# Altium PCB 2019-10-29_14-21-28.PcbDoc
Units mil, origin at the board's own origin, x right, y up, seen from the top; angles counter-clockwise.
Board outline 2004 x 2504 mil, 4 copper layers (Top Layer, MidLayer1, MidLayer2, Bottom Layer); 21 components, 11 nets, 42 pads, 203 vias.
Unrouted connection lines stored in the file: 1.
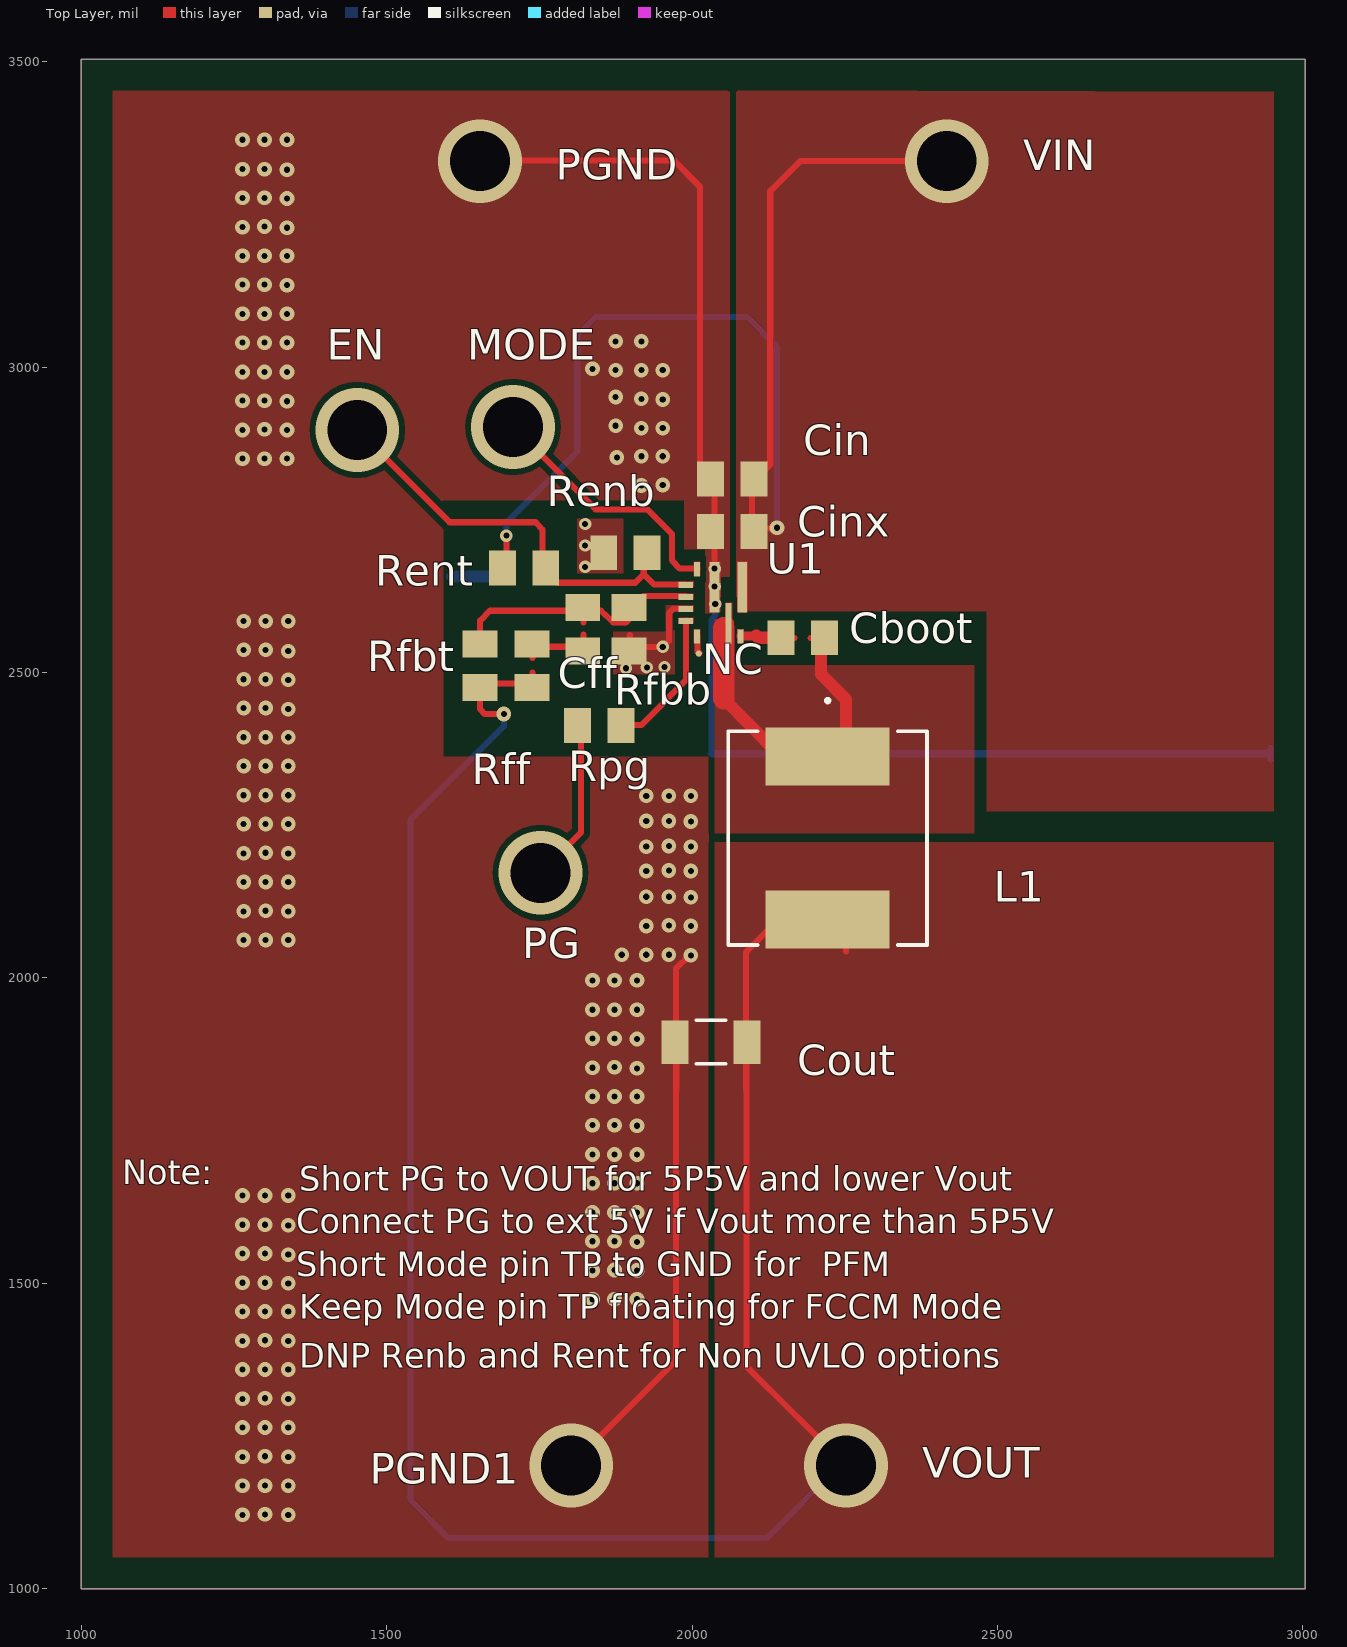
[diagram p0: Top Layer view]
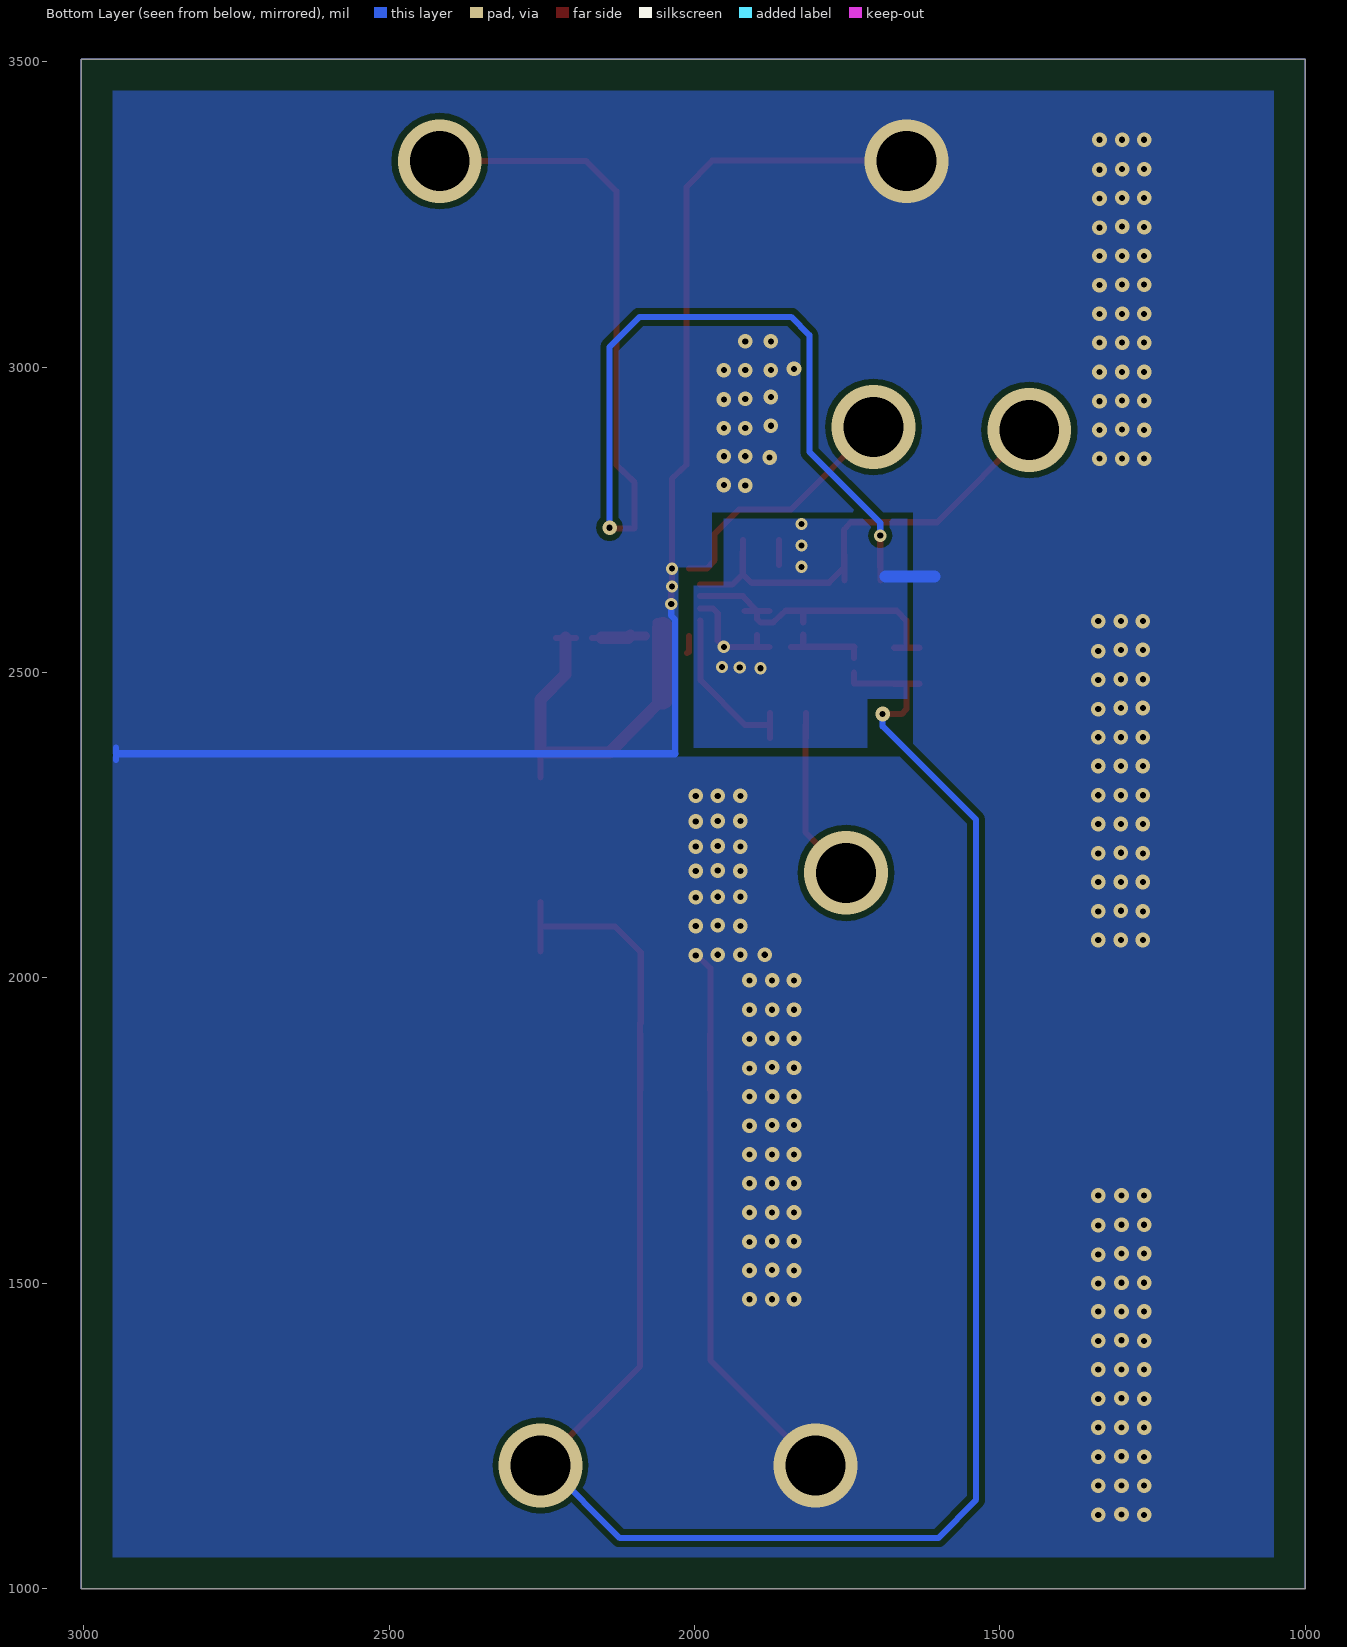
[diagram p1: Bottom Layer view, seen from below]
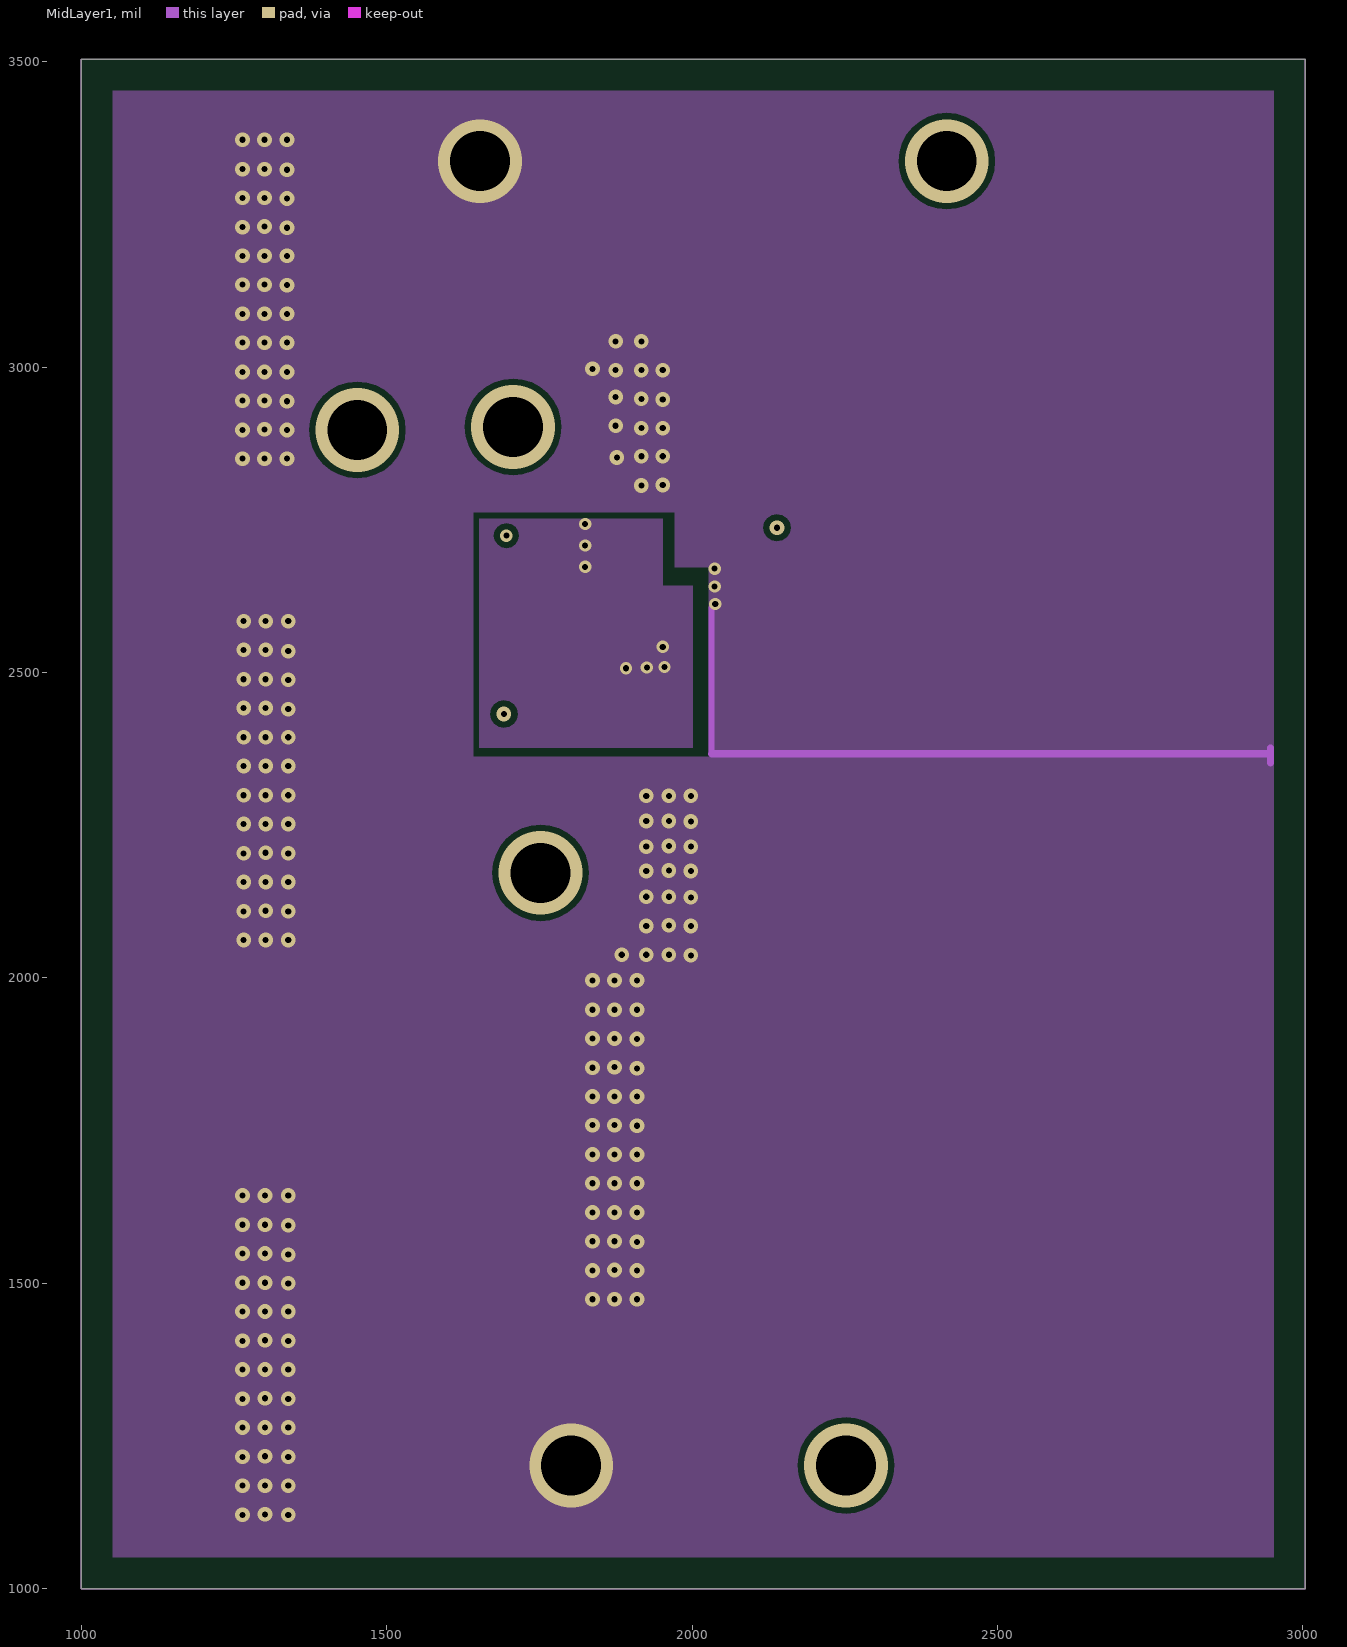
[diagram p2: MidLayer1]
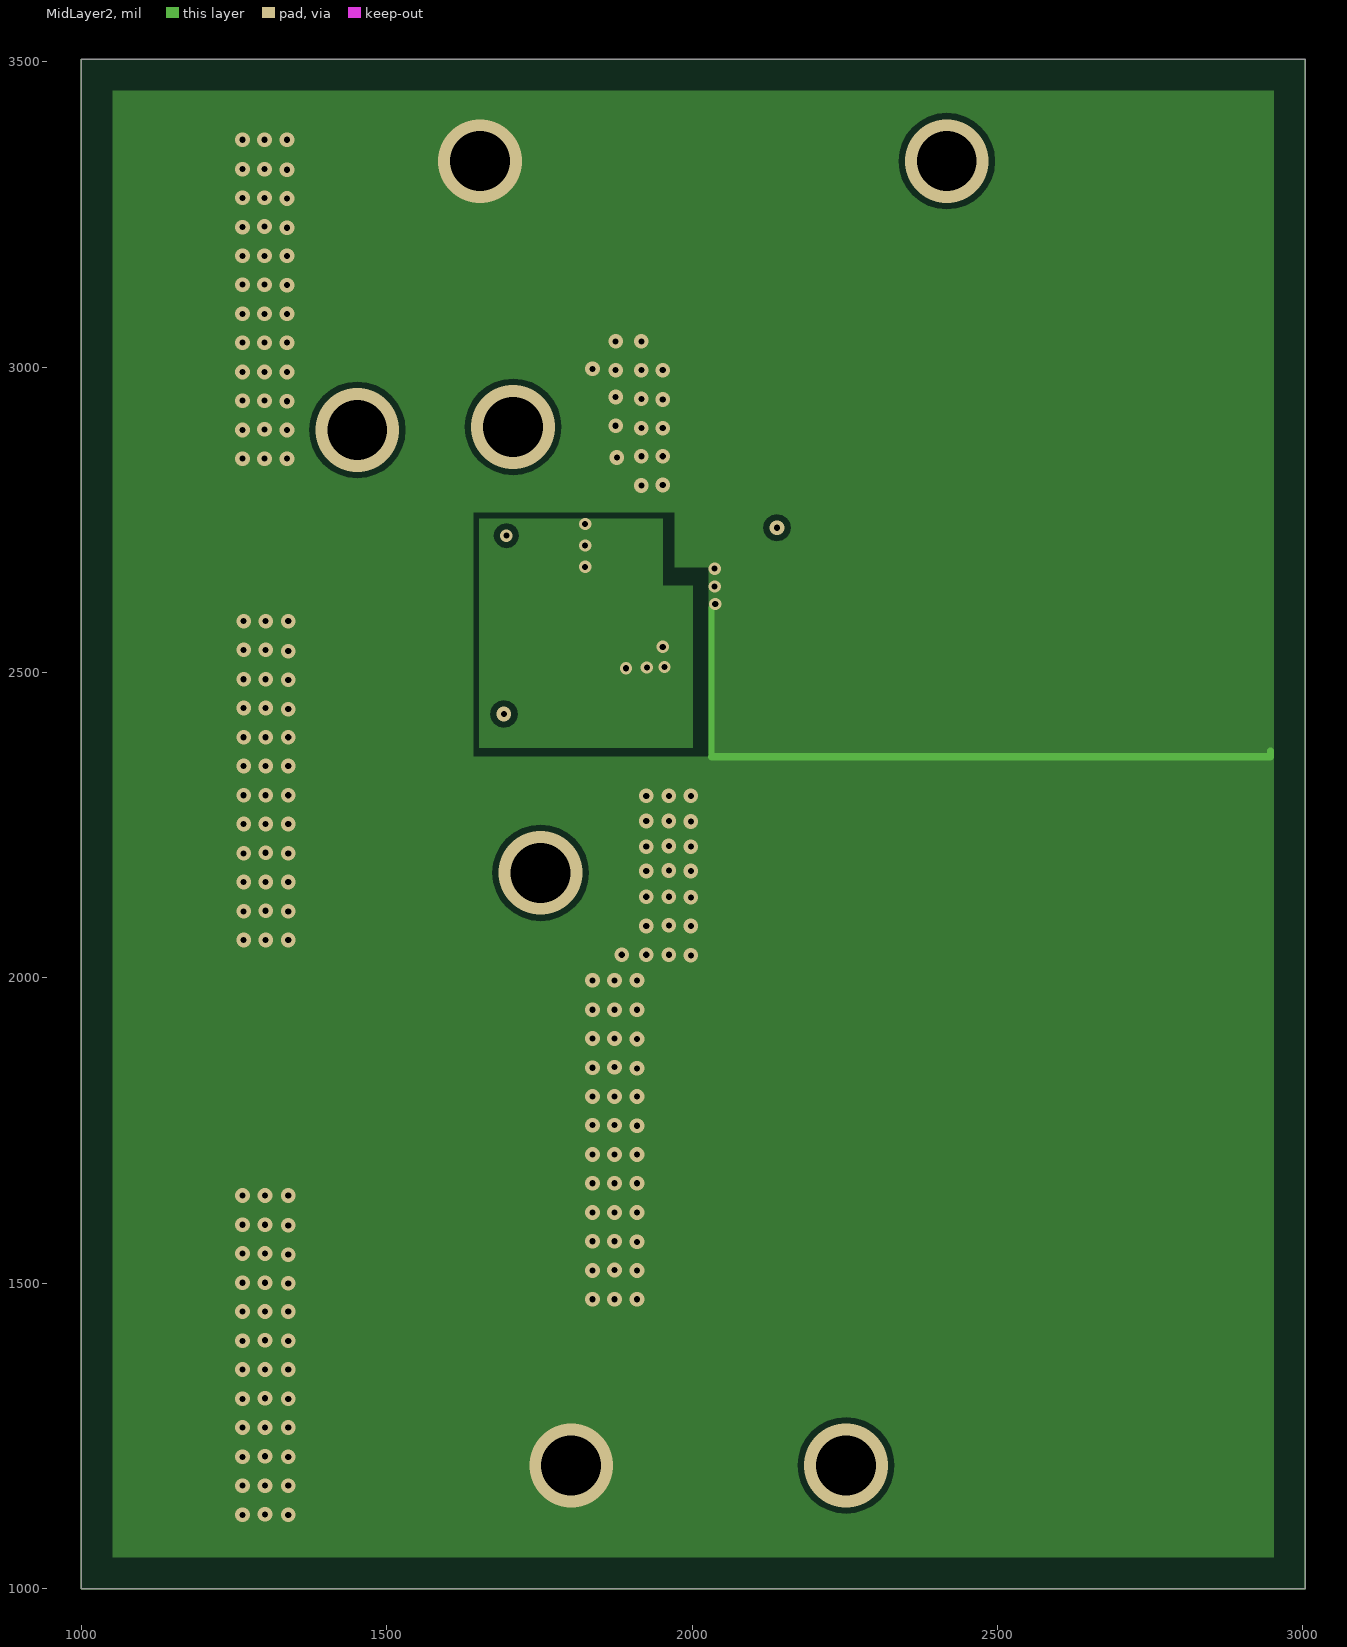
[diagram p3: MidLayer2]

## Layer stack, top to bottom
Top Solder: solder mask 0.4, Solder Resist, Dk 3.5
Top Layer: signal copper 1.4
Dielectric1: core 12.6, FR-4, Dk 4.8
MidLayer1: signal copper 1.4
Dielectric2: prepreg 12.6, FR-4, Dk 4.8
MidLayer2: signal copper 1.4
Dielectric3: core 12.6, FR-4, Dk 4.8
Bottom Layer: signal copper 1.4
Bottom Solder: solder mask 0.4, Solder Resist, Dk 3.5

## Board outline
1000,1000 3004,1000 3004,3504 1000,3504

## Design rules (kind name [scope] priority, off if disabled: settings)
Clearance [All] p1: gap=10 ignorepadtopadclearanceinfootprint=FALSE except(0: Arc-Hole Track-Hole SMDPad-Hole THPad-Hole Via-Hole Fill-Hole Poly-Hole Region-Hole Text-Hole)
PlaneConnect [All] p1: planeconnectstyle=Direct reliefexpansion=20 reliefentries=4 reliefconductorwidth=10 reliefairgap=10
PolygonConnect [All] p1: connectstyle=Direct reliefconductorwidth=10 reliefentries=4 polygonreliefangle="90 Angle" airgapwidth=10
RoutingVias [All] p1: holewidth=28 width=50 viastyle="Through Hole" minholewidth=28 minwidth=50 maxholewidth=28 maxwidth=50
SolderMaskExpansion [All] p1: expansion=4
Width [All] p1: maxlimit=10 minlimit=10 preferedwidth=10
29 further rules are at their usual default settings.

## Components (designator, comment, footprint, x,y, rotation, side; value= is the part's Value field where it differs from the comment)
Cboot "Comment" 0805 2181,2557 r0 top
Cff "Comment" 0805 1821,2571 r90 top
Cin "Comment" 0805 2066,2817 r180 top
Cinx "Comment" 0805 2066,2731 r180 top
Cout "Comment" 1206_190 2031,1895 r180 top
EN "Comment" TP-1502 1451,2896 r90 top
L1 "Comment" IHLP-3232DZ 2222,2229 r270 top
MODE "Comment" TP-1502 1706,2901 r90 top
NC "Comment" SMD_PAD1 2011,2531 r90 top
PG "Comment" TP-1502 1751,2171 r90 top
PGND "Comment" TP-1502 1653,3336 r90 top
PGND1 "Comment" TP-1502 1801,1201 r90 top
Renb "Comment" 0805 1891,2696 r180 top
Rent "Comment" 0805 1725,2671 r180 top
Rfbb "Comment" 0805 1897,2571 r270 top
Rfbt "Comment" 0805 1653,2511 r90 top
Rff "Comment" 0805 1738,2511 r270 top
Rpg "Comment" 0805 1848,2413 r180 top
U1 "Comment" RPA0010A 2045,2614 r0 top
VIN "Comment" TP-1502 2416,3336 r90 top
VOUT "Comment" TP-1502 2251,1201 r90 top

## Footprints (in the part's own frame and the unit in brackets; to place one, negate y for a bottom-side part, rotate by r counter-clockwise, add the part's x,y. Pads: shape width x height; smd on the part's side, far side on the other; paste and mask are expansions set on the pad)
0805 [mil]
  rect 44x57 smd: 1(-35.5,0) 2(35.5,0)
1206_190 [mil]
  rect 44x71 smd: 1(-59,0) 2(59,0)
  silkscreen extent -24,-36 24,36
IHLP-3232DZ [mil]
  rect 95x203 smd: 1(-133.5,0) 2(133.5,0)
  silkscreen extent -228,-163 175,163
RPA0010A [mm]
  rect 0.6x0.25 smd: 1(-1.4,0.75) 2(-1.4,0.25) 3(-1.4,-0.25) 4(-1.4,-0.75)
  rect 0.25x0.6 smd: 5(-0.93,-1.4) 7(0.87,-1.4) 10(-0.93,1.4)
  rect 0.25x1.7 smd: 6(0.37,-0.85)
  rect 0.4x2.1 smd: 8(0.95,0.65) 9(-0.21,0.65)
SMD_PAD1 [mil]
  round 10 smd: 1(0,0)
TP-1502 [mil]
  round 65 / inner round 0 / far side round 65 hole 32 unplated: 1(0,0)

## Via types
v1: diameter 24/24/24/24 (per signal layer), hole 10, Top Layer to Bottom Layer, 185 vias
v2: diameter 20/20/20/20 (per signal layer), hole 10, Top Layer to Bottom Layer, 11 vias
v3: diameter 137/137/137/137 (per signal layer), hole 98, Top Layer to Bottom Layer, 7 vias

## Nets (pads, with @x,y where several pads share a name; then routed paths per layer and width w, separated by ;. In a path a pad name is that pad's centre, name@x,y a point inside that pad or via, vN(x,y) a via of type N, cw(c..) or ccw(c..) an arc to the next point about the centre after c; other vN are vias at no path point)
0: Cin.2 Cinx.2 Cout.2 PGND1.1 PGND.1 Renb.2 Rfbb.2 U1.3 U1.9 | length 5945.9
  Top Layer w10: PGND.1@1653,3338 1971,3338 2013,3295 2013,2840 2037,2817 2037,2732 v2(2037,2670) v2(2037,2641) 2038,2641 v2(2038,2612) ; v3(1802,1202) 1974,1374 1974,1862 1974,2016 1996,2037 v1(1998,2037) ; Renb.2@1861.5,2676 Renb.2@1861.5,2717 ; Rfbb.2@1877,2541.5 Rfbb.2@1918,2541.5 ; 1898,2561 1898,2542 v2(1952,2542) 1962,2552 1962,2597 1970,2605 U1.3@1991,2605 ; 1974.5,1816 Cout.2@1974.5,1908
  MidLayer1 w10: 2032,2367 2032,2606 v2(2038,2612)
  MidLayer1 w11: 2947,2352 2947,2377
  MidLayer1 w12: 2032,2367 2942,2367
  MidLayer2 w10: 2032,2362 2032,2606 v2(2038,2612)
  MidLayer2 w11: 2947,2362 2947,2372
  MidLayer2 w12: 2032,2362 2947,2362
  Bottom Layer w10: 2032,2367 2032,2587 2038,2593 v2(2038,2612) ; 2947,2357 2947,2377
  Bottom Layer w12: 2032,2367 2942,2367
  Bottom Layer w20: 1607,2657 1687,2657
  other v1: 1264,1121 1339,1121 1301,1122 1264,1169 1301,1169 1339,1169 1264,1216 1339,1216 1301,1217 1264,1264 1301,1264 1339,1264 1264,1311 1339,1311 1301,1312 1264,1359 1301,1359 1339,1359 1264,1406 1339,1406 1301,1407 1264,1454 1301,1454 1339,1454 1837,1474 1873,1474 1910,1474 1339,1500 1264,1501 1301,1501 1837,1521 1910,1521 1873,1522 1339,1547 1264,1549 1301,1549 1910,1568 1837,1569 1873,1569 1339,1595 1264,1596 1301,1596 1837,1616 1873,1616 1910,1616 1264,1644 1301,1644 1339,1644 1837,1664 1873,1664 1910,1664 1837,1711 1873,1711 1910,1711 1910,1758 1837,1759 1873,1759 1837,1806 1873,1806 1910,1806 1910,1852 1837,1853 1873,1854 1910,1900 1837,1901 1873,1901 1837,1948 1873,1948 1910,1948 1837,1996 1873,1996 1910,1996 1885,2038 1925,2038 1962,2038 1266,2062 1302,2062 1339,2062 1925,2085 1998,2085 1962,2086 1266,2109 1339,2109 1302,2110 1998,2132 1925,2133 1962,2133 1266,2157 1302,2157 1339,2157 1925,2175 1998,2175 1962,2176 1266,2204 1339,2204 1302,2205 1925,2215 1998,2215 1962,2216 1266,2252 1302,2252 1339,2252 1998,2256 1925,2257 1962,2257 1925,2298 1962,2298 1998,2298 1266,2299 1302,2299 1339,2299 1266,2347 1302,2347 1339,2347 1266,2394 1302,2394 1339,2394 1339,2440 1266,2442 1302,2442 1339,2488 1266,2489 1302,2489 1339,2535 1266,2537 1302,2537 1266,2584 1302,2584 1339,2584 1917,2806 1952,2807 1264,2850 1300,2850 1337,2850 1877,2852 1917,2854 1952,2854 1264,2897 1337,2897 1300,2898 1917,2900 1952,2900 1875,2904 1337,2944 1264,2945 1300,2945 1952,2947 1917,2948 1875,2951 1264,2992 1300,2992 1337,2992 1875,2995 1917,2995 1952,2995 1837,2997 1264,3040 1300,3040 1337,3040 1875,3042 1917,3042 1264,3087 1300,3087 1337,3087 1337,3134 1264,3135 1300,3135 1264,3182 1300,3182 1337,3182 1337,3228 1264,3229 1300,3230 1337,3276 1264,3277 1300,3277 1337,3323 1264,3324 1300,3324 1264,3372 1300,3372 1337,3372
  other v2: 1892,2507 1926,2508 1955,2509 1825,2673 1825,2708 1825,2743
  other v3: 1653,3337
1: Cff.2 Rfbb.1 Rfbt.2 U1.2 | length 563.9
  Top Layer w10: Rfbt.2@1632,2540.5 Rfbt.2@1673,2540.5 ; Rfbt.2@1653,2541 1653,2585 1669,2601 Cff.2@1822,2601 ; Cff.2@1801,2600.5 Cff.2@1842,2600.5 ; 1822,2582 Cff.2@1822,2601 ; Rfbb.1@1877,2600.5 Rfbb.1@1918,2600.5 ; U1.2@1991,2625 1921,2625 1898,2601 1898,2588 1892,2582 1871,2582 1851,2601 Cff.2@1822,2601
2: Cout.1 L1.2 PG.1 Rfbt.1 Rff.2 Rpg.2 VOUT.1 | length 3939.9
  Top Layer w10: Rfbt.1@1632,2481.5 Rfbt.1@1673,2481.5 ; v1(1692,2432) 1661,2432 1653,2440 1653,2482 1739,2482 1739,2500 ; v3(1752,2172) 1818,2238 Rpg.2@1818,2414 ; Rpg.2@1817.5,2393 Rpg.2@1817.5,2434 ; Cout.1@2088,1926 2088,2042 2130,2084 L1.2@2252,2084 ; 2088.5,1816 Cout.1@2088.5,1908 ; Cout.1@2089,1926 2089,1862 2089,1364 v3(2252,1202) ; 2252,2043 L1.2@2252,2124
  Bottom Layer w10: v1(1692,2432) 1692,2412 1539,2259 1539,1146 1601,1083 2122,1083 2241,1202 v3(2252,1202)
3: Cff.1 Rff.1 | length 162
  Top Layer w10: 1739,2524 Rff.1@1739,2541 ; Cff.1@1801,2541.5 Cff.1@1842,2541.5 ; Cff.1@1822,2542 1822,2562
  Top Layer w11: Rff.1@1739,2541 1739,2542 Cff.1@1822,2542
5: Cboot.2 L1.1 U1.6 | length 684.5
  Top Layer w10: 2194,2556.5 Cboot.2@2227,2556.5 ; L1.1@2252,2328 L1.1@2252,2409
  Top Layer w15: 2052,2573 U1.6@2061,2582
  Top Layer w20: 2052,2457 2139,2369 2252,2369 2252,2456 2211,2497 Cboot.2@2211,2557
  Top Layer w35: 2052,2457 2052,2573
6: Cin.1 Cinx.1 Rent.2 U1.8 VIN.1 | length 2040.2
  Top Layer w10: Rent.2@1695.5,2651 Rent.2@1695.5,2692 ; Rent.2@1696,2672 v2(1696,2724) ; v1(2139,2737) 2138,2736 2098,2736 2098,2811 2128,2840 2128,3288 2177,3337 v3(2417,3337)
  Bottom Layer w10: v2(1696,2724) 1696,2745 1812,2861 1812,3052 1842,3082 2090,3082 2139,3033 v1(2139,2737)
10: EN.1 Renb.1 Rent.1 U1.1 | length 810
  Top Layer w10: v3(1452,2897) 1603,2746 1744,2746 1755,2734 1755,2672 1780,2647 1907,2647 1921,2661 ; Rent.1@1754.5,2651 Rent.1@1754.5,2692 ; Renb.1@1920.5,2676 Renb.1@1920.5,2717 ; Renb.1@1921,2697 1921,2661 ; U1.1@1991,2644 1938,2644 1921,2661
16: Cboot.1 U1.7 | length 106.2
  Top Layer w10: Cboot.1@2135,2556.5 2168,2556.5
  Top Layer w15: U1.7@2080,2560 2105,2560
  Top Layer w20: 2105,2560 2108,2557 Cboot.1@2152,2557
17: Rpg.1 U1.4 | length 281.2
  Top Layer w10: Rpg.1@1876.5,2393 Rpg.1@1876.5,2434 ; Rpg.1@1879,2414 1917,2414 1990,2487 1990,2585 U1.4@1991,2585
18: MODE.1 U1.10 | length 423.6
  Top Layer w10: v3(1707,2902) 1842,2767 1927,2767 1967,2727 1967,2684 1980,2670 U1.10@2009,2670
19: NC.1 U1.5 | length 29.6
  Top Layer w10: U1.5@2009,2560 2009,2534 NC.1@2012,2532

## Polygon pours and split planes (outlines as drawn)
no net on Top Paste "Top Layer-No Net" (solid, remove dead copper): 2028.86,2645.5 2028.86,2678.96 2028.9,2679.34 2029.01,2679.71 2029.19,2680.05 2029.43,2680.35 2029.73,2680.6 2030.07,2680.78 2030.44,2680.89 2030.83,2680.93 2042.64,2680.93 2043.02,2680.89 2043.39,2680.78 2043.73,2680.6 2044.03,2680.35 2044.27,2680.05 2044.46,2679.71 2044.57,2679.34 2044.61,2678.96 2044.61,2645.5 2044.57,2645.11 2044.46,2644.74 2044.27,2644.4 2044.03,2644.1 2043.73,2643.86 2043.39,2643.68 2043.02,2643.57 2042.64,2643.53 2030.83,2643.53 2030.44,2643.57 2030.07,2643.68 2029.73,2643.86 2029.43,2644.1 2029.19,2644.4 2029.01,2644.74 2028.9,2645.11
no net on Top Paste "Top Layer-No Net" (solid, remove dead copper): 2028.86,2600.22 2028.86,2633.68 2028.9,2634.07 2029.01,2634.44 2029.19,2634.78 2029.43,2635.08 2029.73,2635.32 2030.07,2635.5 2030.44,2635.62 2030.83,2635.65 2042.64,2635.65 2043.02,2635.62 2043.39,2635.5 2043.73,2635.32 2044.03,2635.08 2044.27,2634.78 2044.46,2634.44 2044.57,2634.07 2044.61,2633.68 2044.61,2600.22 2044.57,2599.84 2044.46,2599.47 2044.27,2599.13 2044.03,2598.83 2043.73,2598.58 2043.39,2598.4 2043.02,2598.29 2042.64,2598.25 2030.83,2598.25 2030.44,2598.29 2030.07,2598.4 2029.73,2598.58 2029.43,2598.83 2029.19,2599.13 2029.01,2599.47 2028.9,2599.84
no net on Top Paste "Top Layer-No Net" (solid, remove dead copper): 2054.65,2586.44 2054.65,2612.03 2054.68,2612.42 2054.8,2612.78 2054.98,2613.13 2055.22,2613.42 2055.52,2613.67 2055.86,2613.85 2056.23,2613.96 2056.61,2614 2062.52,2614 2062.9,2613.96 2063.27,2613.85 2063.61,2613.67 2063.91,2613.42 2064.16,2613.13 2064.34,2612.78 2064.45,2612.42 2064.49,2612.03 2064.49,2586.44 2064.45,2586.06 2064.34,2585.69 2064.16,2585.35 2063.91,2585.05 2063.61,2584.8 2063.27,2584.62 2062.9,2584.51 2062.52,2584.47 2056.61,2584.47 2056.23,2584.51 2055.86,2584.62 2055.52,2584.8 2055.22,2585.05 2054.98,2585.35 2054.8,2585.69 2054.68,2586.06
no net on Top Paste "Top Layer-No Net" (solid, remove dead copper): 2054.65,2549.04 2054.65,2574.63 2054.68,2575.01 2054.8,2575.38 2054.98,2575.72 2055.22,2576.02 2055.52,2576.27 2055.86,2576.45 2056.23,2576.56 2056.61,2576.6 2062.52,2576.6 2062.9,2576.56 2063.27,2576.45 2063.61,2576.27 2063.91,2576.02 2064.16,2575.72 2064.34,2575.38 2064.45,2575.01 2064.49,2574.63 2064.49,2549.04 2064.45,2548.66 2064.34,2548.29 2064.16,2547.95 2063.91,2547.65 2063.61,2547.4 2063.27,2547.22 2062.9,2547.11 2062.52,2547.07 2056.61,2547.07 2056.23,2547.11 2055.86,2547.22 2055.52,2547.4 2055.22,2547.65 2054.98,2547.95 2054.8,2548.29 2054.68,2548.66
no net on Top Paste "Top Layer-No Net" (solid, remove dead copper): 2084.37,2601.2 2084.37,2607.11 2086.34,2609.08 2109.96,2609.08 2111.93,2607.11 2111.93,2601.2 2109.96,2599.24 2086.34,2599.24
no net on Top Paste "Top Layer-No Net" (solid, remove dead copper): 2084.37,2620.89 2084.37,2626.8 2086.34,2628.76 2109.96,2628.76 2111.93,2626.8 2111.93,2620.89 2109.96,2618.92 2086.34,2618.92
no net on Top Paste "Top Layer-No Net" (solid, remove dead copper): 2084.37,2640.57 2084.37,2646.48 2086.34,2648.45 2109.96,2648.45 2111.93,2646.48 2111.93,2640.57 2109.96,2638.61 2086.34,2638.61
no net on Top Solder "Top Layer-No Net" (solid, remove dead copper): 2084.37,2601.2 2084.37,2607.11 2086.34,2609.08 2109.96,2609.08 2111.93,2607.11 2111.93,2601.2 2109.96,2599.24 2086.34,2599.24
no net on Top Solder "Top Layer-No Net" (solid, remove dead copper): 2084.37,2620.89 2084.37,2626.8 2086.34,2628.76 2109.96,2628.76 2111.93,2626.8 2111.93,2620.89 2109.96,2618.92 2086.34,2618.92
no net on Top Solder "Top Layer-No Net" (solid, remove dead copper): 2084.37,2640.57 2084.37,2646.48 2086.34,2648.45 2109.96,2648.45 2111.93,2646.48 2111.93,2640.57 2109.96,2638.61 2086.34,2638.61
10 on Top Layer "Top Layer-No Net" (solid, pour order 0): 1979,2640 1979,2649 2002,2649 2002,2640
1 on Top Layer "Top Layer-No Net" (solid, pour order 1): 1979,2620 1979,2629 2002,2629 2002,2620
17 on Top Layer "Top Layer-No Net" (solid, pour order 2): 1979,2581 1979,2590 2002,2590 2002,2581
19 on Top Layer "Top Layer-No Net" (solid, pour order 3): 2004,2548 2004,2571 2013,2571 2013,2548
5 on Top Layer "Top Layer-No Net" (solid, pour order 4): 2056,2548 2056,2614 2065,2614 2065,2548
16 on Top Layer "Top Layer-No Net" (solid, pour order 5): 2075,2548 2075,2571 2084,2571 2084,2548
6 on Top Layer "Top Layer-No Net" (solid, pour order 6): 2075,2599 2075,2681 2090,2681 2090,2599
18 on Top Layer "Top Layer-No Net" (solid, pour order 7): 2004,2658 2004,2681 2013,2681 2013,2658
19 on Top Layer "Top Layer-No Net" (solid, pour order 8): 2017,2532 2016,2532 2016,2533 2016,2534 2015,2535 2014,2536 2013,2536 2012,2536 2012,2537 2011,2536 2010,2536 2009,2536 2008,2535 2007,2534 2007,2533 2007,2532 2007,2531 2007,2530 2007,2529 2008,2528 2009,2527 2010,2527 2011,2527 2012,2527 2013,2527 2014,2527 2015,2528 2016,2529 2016,2530 2016,2531 2017,2532
6 on Top Layer "Top Layer-No Net" (solid, pour order 9): 2072,3453 2072,2600 2482,2600 2482,2273 2952,2273 2952,3451
2 on Top Layer "Top Layer-No Net" (solid, pour order 10): 2952,2222 2037,2222 2037,1052 2952,1052
5 on Top Layer "Top Layer-No Net" (solid, pour order 11): 2067,2587 2067,2512 2462,2512 2462,2237 2037,2237 2037,2587
0 on Top Layer "Top Layer-No Net" (solid, pour order 12): 1979,2600 1979,2609 2002,2609 2002,2600
0 on Top Layer "Top Layer-No Net" (solid, pour order 13): 2030,2599 2030,2681 2045,2681 2045,2599
0 on Top Layer "Top Layer-No Net" (solid, pour order 20): 2047,2657 2047,2597 2022,2597 2022,2702 1987,2702 1987,2782 1593,2782 1593,2362 2027,2362 2027,1052 1052,1052 1052,3452 2062,3452 2062,2657
0 on Top Layer "Top Layer-No Net" (solid, pour order 21): 1887,2752 1812,2752 1812,2657 1887,2657
0 on Top Layer "Top Layer-No Net" (solid, pour order 22): 1972,2597 1972,2497 1871,2497 1871,2567 1957,2567 1957,2612 2002,2612 2002,2597
0 on Bottom Layer "Top Layer-No Net" (solid, pour order 18): 1652,2457 1717,2457 1717,2377 2001,2377 2001,2572 2001,2642 1952,2642 1952,2752 1652,2752
0 on Bottom Layer "Top Layer-No Net" (solid, pour order 19): 2952,2367 2027,2367 2027,2672 1972,2672 1972,2762 1642,2762 1642,2362 2952,2362 2952,1052 1052,1052 1052,3452 2952,3452
0 on MidLayer1 "Top Layer-No Net" (solid, pour order 14): 2001,2642 1952,2642 1952,2752 1652,2752 1652,2377 2001,2377 2001,2572
0 on MidLayer1 "Top Layer-No Net" (solid, pour order 15): 2952,2367 2027,2367 2027,2672 1972,2672 1972,2762 1642,2762 1642,2362 2952,2362 2952,1052 1052,1052 1052,3452 2952,3452
0 on MidLayer2 "Top Layer-No Net" (solid, pour order 16): 2001,2642 1952,2642 1952,2752 1652,2752 1652,2377 2001,2377 2001,2572
0 on MidLayer2 "Top Layer-No Net" (solid, pour order 17): 2952,2367 2027,2367 2027,2672 1972,2672 1972,2762 1642,2762 1642,2362 2952,2362 2952,1052 1052,1052 1052,3452 2952,3452

## Other copper
Multi-Layer:
  the board outline again, w1

## Silkscreen, mask and mechanical layers (free items; w line width, h text height)
Top Overlay:
  text "Note:" at 1067,1662 h40
  text "Short PG to VOUT for 5P5V and lower Vout" at 1357,1652 h40
  text "Connect PG to ext 5V if Vout more than 5P5V" at 1352,1582 h40
  text "Short Mode pin TP to GND  for  PFM" at 1352,1512 h40
  text "Keep Mode pin TP floating for FCCM Mode" at 1357,1442 h40
  text "DNP Renb and Rent for Non UVLO options" at 1357,1362 h40